# Altium PCB PCB.PcbDoc
Units mil, origin at the board's own origin, x right, y up, seen from the top; angles counter-clockwise.
Board outline 6000 x 4000 mil, 2 copper layers (Top Layer, Bottom Layer); 125 components, 112 nets, 372 pads, 0 vias.
Unrouted connection lines stored in the file: 244.
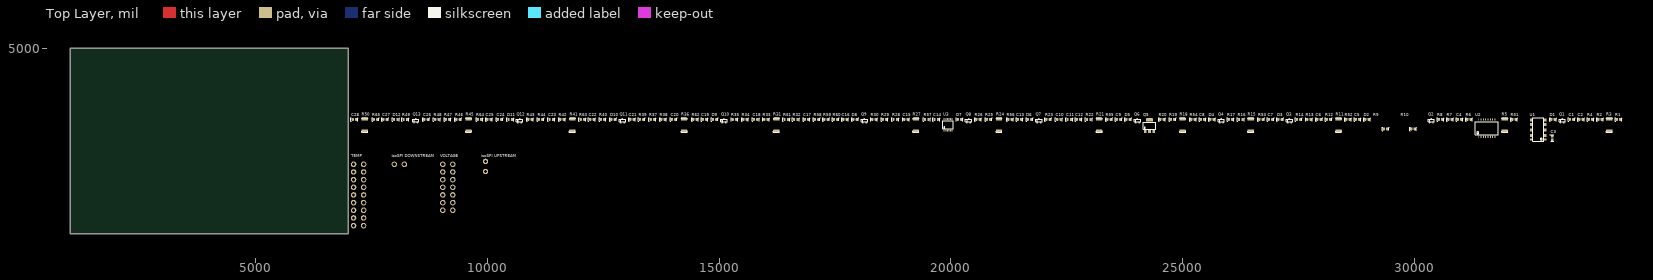
[diagram p0: Top Layer view]
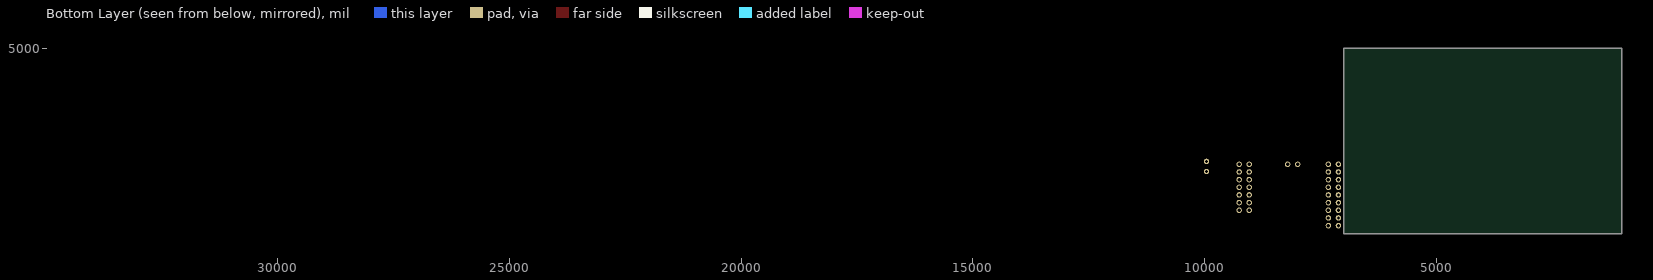
[diagram p1: Bottom Layer view, seen from below]

## Layer stack, top to bottom
Top Solder: solder mask 0.4, Solder Resist, Dk 3.5
Top Layer: signal copper 1.4
Dielectric 1: dielectric 12.6, FR-4, Dk 4.8
Bottom Layer: signal copper 1.4
Bottom Solder: solder mask 0.4, Solder Resist, Dk 3.5

## Board outline
1000,1000 7000,1000 7000,5000 1000,5000

## Design rules (kind name [scope] priority, off if disabled: settings)
Clearance [All] p1: gap=10 ignorepadtopadclearanceinfootprint=FALSE except(0: Arc-Hole Track-Hole SMDPad-Hole THPad-Hole Via-Hole Fill-Hole Poly-Hole Region-Hole Text-Hole; 3.94: THPad-THPad; 6: Arc-SMDPad Track-SMDPad SMDPad-SMDPad; 7.87: Arc-THPad Track-THPad SMDPad-THPad THPad-Via; 8: Arc-Arc Arc-Track Arc-Region Track-Track Track-Region SMDPad-Region THPad-Region Via-Region Fill-Region Poly-Region Region-Region; 23.62: Arc-Poly Track-Poly SMDPad-Poly THPad-Poly Via-Poly Fill-Poly Poly-Poly)
Height [All] p1: minheight=0 maxheight=1968.5 prefheight=500
HoleSize [All] p1: absolutevalues=TRUE maxlimit=393.7 minlimit=1 maxpercent=80.000 minpercent=20.000
PlaneClearance [All] p1: clearance=15.75
PlaneConnect [All] p1: pad.planeconnectstyle=Relief pad.reliefexpansion=20 pad.reliefentries=4 pad.reliefconductorwidth=31.5 pad.reliefairgap=10 via.planeconnectstyle=Direct via.reliefexpansion=20 via.reliefentries=4 via.reliefconductorwidth=31.5 via.reliefairgap=10
PolygonConnect [All] p1: thpad.connectstyle=Relief thpad.reliefconductorwidth=23.62 thpad.reliefentries=4 thpad.polygonreliefangle="90 Angle" thpad.airgapwidth=10 smdpad.connectstyle=Relief smdpad.reliefconductorwidth=23.62 smdpad.reliefentries=4 smdpad.polygonreliefangle="90 Angle" smdpad.airgapwidth=10 via.connectstyle=Direct via.reliefconductorwidth=23.62 via.reliefentries=4 via.polygonreliefangle="90 Angle" via.airgapwidth=10
RoutingVias [All] p1: holewidth=28 width=50 viastyle="Through Hole" minholewidth=8 minwidth=10 maxholewidth=28 maxwidth=50
SolderMaskExpansion [All] p1: expansion=2
Width [All] p1: maxlimit=118.11 minlimit=5 preferedwidth=19.68
26 further rules are at their usual default settings.

## Classes and differential pairs
component class "Top Level": "isoSPI DOWNSTREAM" "isoSPI UPSTREAM" TEMP VOLTAGE

## Components (designator, comment, footprint, x,y, rotation, side; value= is the part's Value field where it differs from the comment)
C1 "100nF" 0805 33395,3465 r0 top
C2 "100nF" 0805 33595,3465 r0 top
C3 "10nF" 0805 32975,3060 r270 top
C4 "10nF" 0805 30975,3465 r0 top
C5 "10nF" 0805 28775,3465 r0 top
C6 "10nF" 0805 27945,3465 r0 top
C7 "10nF" 0805 26900,3465 r0 top
C8 "10nF" 0805 25430,3465 r0 top
C9 "10nF" 0805 23620,3465 r0 top
C10 "1uF" 0805 22330,3465 r0 top
C11 "1uF" 0805 22555,3465 r0 top
C12 "1uF" 0805 22755,3465 r0 top
C13 "10nF" 0805 21480,3465 r0 top
C14 "10nF" 0805 19685,3465 r0 top
C15 "100nF" 0805 19030,3465 r0 top
C16 "1uF" 0805 17715,3465 r0 top
C17 "10nF" 0805 16885,3465 r0 top
C18 "1uF" 0805 15790,3465 r0 top
C19 "10nF" 0805 14685,3465 r0 top
C20 "1uF" 0805 14020,3465 r0 top
C21 "1uF" 0805 13120,3465 r0 top
C22 "10nF" 0805 12255,3465 r0 top
C23 "1uF" 0805 11380,3465 r0 top
C24 "10nF" 0805 10265,3465 r0 top
C25 "1uF" 0805 10035,3465 r0 top
C26 "1uF" 0805 8680,3465 r0 top
C27 "10nF" 0805 7795,3465 r0 top
C28 "1uF" 0805 7130,3465 r0 top
D1 "Red" "0805 LED" 32990,3465 r0 top
D2 "Red" "0805 LED" 28980,3465 r0 top
D3 "Red" "0805 LED" 27105,3465 r0 top
D4 "Red" "0805 LED" 25635,3465 r0 top
D5 "Red" "0805 LED" 23825,3465 r0 top
D6 "Red" "0805 LED" 21700,3465 r0 top
D7 "Red" "0805 LED" 20185,3465 r0 top
D8 "Red" "0805 LED" 17935,3465 r0 top
D9 "Red" "0805 LED" 14905,3465 r0 top
D10 "Red" "0805 LED" 12715,3465 r0 top
D11 "Red" "0805 LED" 10495,3465 r0 top
D12 "Red" "0805 LED" 8025,3465 r0 top
"isoSPI DOWNSTREAM" "39300020" 39300020 8210,2495 r90 top
"isoSPI UPSTREAM" "39300020" 39300020 9960,2340 r0 top
Q1 "BSS308PEH6327XTSA1" "IN SOT-23 MOSFET" 33190,3435 r0 top
Q2 "BSS308PEH6327XTSA1" "IN SOT-23 MOSFET" 30365,3435 r0 top
Q3 "BSS308PEH6327XTSA1" "IN SOT-23 MOSFET" 27305,3435 r0 top
Q4 "BSS308PEH6327XTSA1" "IN SOT-23 MOSFET" 25835,3435 r0 top
Q5 "NSV1C201MZ4T1G" "ON SOT-223 BJT" 24195,3205 r0 top
Q6 "BSS308PEH6327XTSA1" "IN SOT-23 MOSFET" 24025,3435 r0 top
Q7 "BSS308PEH6327XTSA1" "IN SOT-23 MOSFET" 21900,3435 r0 top
Q8 "BSS308PEH6327XTSA1" "IN SOT-23 MOSFET" 20385,3435 r0 top
Q9 "BSS308PEH6327XTSA1" "IN SOT-23 MOSFET" 18135,3435 r0 top
Q10 "BSS308PEH6327XTSA1" "IN SOT-23 MOSFET" 15105,3435 r0 top
Q11 "BSS308PEH6327XTSA1" "IN SOT-23 MOSFET" 12915,3435 r0 top
Q12 "BSS308PEH6327XTSA1" "IN SOT-23 MOSFET" 10695,3435 r0 top
Q13 "BSS308PEH6327XTSA1" "IN SOT-23 MOSFET" 8455,3435 r0 top
R1 "100R" 0805 34405,3465 r0 top
R2 "100R" 0805 34005,3465 r0 top
R3 "100R" 2512 34205,3215 r90 top
R4 "3.3k" 0805 33800,3465 r0 top
R5 "33R" 2512 31950,3215 r90 top
R6 "100R" 0805 31180,3465 r0 top
R7 "3.3k" 0805 30770,3465 r0 top
R8 "100R" 0805 30565,3465 r0 top
R9 "1k" 0805 29380,3260 r0 top
R10 "1k" 0805 29970,3260 r0 top
R11 "33R" 2512 28365,3215 r90 top
R12 "100R" 0805 28150,3465 r0 top
R13 "3.3k" 0805 27725,3465 r0 top
R14 "100R" 0805 27505,3465 r0 top
R15 "33R" 2512 26470,3215 r90 top
R16 "100R" 0805 26255,3465 r0 top
R17 "3.3k" 0805 26035,3465 r0 top
R18 "33R" 2512 25000,3215 r90 top
R19 "100R" 0805 24785,3465 r0 top
R20 "3.3k" 0805 24555,3465 r0 top
R21 "33R" 2512 23200,3215 r90 top
R22 "100R" 0805 22975,3465 r0 top
R23 "3.3k" 0805 22100,3465 r0 top
R24 "33R" 2512 21040,3215 r90 top
R25 "100R" 0805 20815,3465 r0 top
R26 "3.3k" 0805 20585,3465 r0 top
R27 "33R" 2512 19245,3215 r90 top
R28 "100R" 0805 18800,3465 r0 top
R29 "10k" 0805 18570,3465 r0 top
R30 "3.3k" 0805 18340,3465 r0 top
R31 "33R" 2512 16235,3215 r90 top
R32 "10k" 0805 16655,3465 r0 top
R33 "100R" 0805 16010,3465 r0 top
R34 "3.3k" 0805 15560,3465 r0 top
R35 "10k" 0805 15330,3465 r0 top
R36 "33R" 2512 14245,3215 r90 top
R37 "100R" 0805 13560,3465 r0 top
R38 "10k" 0805 13790,3465 r0 top
R39 "3.3k" 0805 13330,3465 r0 top
R40 "10k" 0805 12485,3465 r0 top
R41 "33R" 2512 11835,3215 r90 top
R42 "100R" 0805 11610,3465 r0 top
R43 "3.3k" 0805 10920,3465 r0 top
R44 "10k" 0805 11150,3465 r0 top
R45 "33R" 2512 9595,3215 r90 top
R46 "10k" 0805 9370,3465 r0 top
R47 "100R" 0805 9140,3465 r0 top
R48 "3.3k" 0805 8910,3465 r0 top
R49 "10k" 0805 8230,3465 r0 top
R50 "33R" 2512 7355,3215 r90 top
R51 "470R" 0805 32150,3465 r0 top
R52 "470R" 0805 28570,3465 r0 top
R53 "470R" 0805 26695,3465 r0 top
R54 "470R" 0805 25225,3465 r0 top
R55 "470R" 0805 23415,3465 r0 top
R56 "470R" 0805 21275,3465 r0 top
R57 "470R" 0805 19480,3465 r0 top
R58 "56k" 0805 17105,3465 r0 top
R59 "56k" 0805 17310,3465 r0 top
R60 "56k" 0805 17515,3465 r0 top
R61 "470R" 0805 16450,3465 r0 top
R62 "470R" 0805 14480,3465 r0 top
R63 "470R" 0805 12050,3465 r0 top
R64 "470R" 0805 9830,3465 r0 top
R65 "470R" 0805 7590,3465 r0 top
TEMP "39300180" 39300180 7330,2495 r90 top
U1 "LTC6811-1" "LT 48-SSOP" 32670,3245 r90 top
U2 "TG110-AE050N5LFTR" "HALO N5" 31565,3275 r0 top
U3 "ADG708" "AD 16-TSSOP" 19850,3220 r0 top
VOLTAGE "39300140" 39300140 9255,2495 r90 top

## Footprints (in the part's own frame and the unit in brackets; to place one, negate y for a bottom-side part, rotate by r counter-clockwise, add the part's x,y. Pads: shape width x height; smd on the part's side, far side on the other; paste and mask are expansions set on the pad)
0805 [mil]
  rrect50% 51.18x59.06 smd: 1(-37.87,-1.03) 2(36.93,-1.03)
  silkscreen extent -73,-37 71,37, body extent -39,-26 39,26, height 29
"0805 LED" [mil]
  rrect50% 51.18x59.06 smd: A(-37.87,-1.03) K(36.93,-1.03)
  silkscreen extent -73,-37 71,37, body extent -43,-25 35,25, height 39
2512 [mm]
  rrect50% 1.6x3.5 smd: 1(0,0) 2(6.5,0)
  silkscreen extent -0.85,-1.6 7.3,1.6, body extent 0.1,-1.6 6.4,1.6, height 0.7
39300020 [mm]
  round 3 hole 1.8: 1(0,0) 2(0,5.5)
  round 1.524 hole 3.05: ""(0,-7.3)
  body extent -2.7,-13.97 3.1,5.97, height 11.4
39300140 [mm]
  round 3 hole 1.85: 1(0,0) 2(0,5.5) 3(-4.2,0) 4(-4.2,5.5) 5(-8.4,0) 6(-8.4,5.5) 7(-12.6,0) 8(-12.6,5.5) 9(-16.8,0) 10(-16.8,5.5) 11(-21,0) 12(-21,5.5) 13(-25.2,0) 14(-25.2,5.5)
  round 1.524 hole 3.05: ""(-25.2,-7.3) ""(0,-7.3)
  body extent -27.9,-13.9 3.1,6.04, height 11.4
39300180 [mm]
  round 3 hole 1.85: 1(0,0) 2(0,5.5) 3(-4.2,0) 4(-4.2,5.5) 5(-8.4,0) 6(-8.4,5.5) 7(-12.6,0) 8(-12.6,5.5) 9(-16.8,0) 10(-16.8,5.5) 11(-21,0) 12(-21,5.5) 13(-25.2,0) 14(-25.2,5.5) 15(-29.4,0) 16(-29.4,5.5) 17(-33.6,0) 18(-33.6,5.5)
  round 1.524 hole 3.05: ""(-33.6,-7.3) ""(0,-7.3)
  body extent -36.3,-13.87 3.1,6.07, height 11.4
"AD 16-TSSOP" [mm]
  oval 0.3x1.05 smd: 1(0.05,0.1) 2(0.7,0.1) 3(1.35,0.1) 4(2,0.1) 5(2.65,0.1) 6(3.3,0.1) 7(3.95,0.1) 8(4.6,0.1) 9(4.6,6.4) 10(3.95,6.4) 11(3.3,6.4) 12(2.65,6.4) 13(2,6.4) 14(1.35,6.4) 15(0.7,6.4) 16(0.05,6.4)
  silkscreen extent -0.5,1 5.1,5.5, body extent -0.24,0.05 4.86,6.45, height 1.2
"HALO N5" [mil]
  rrect50% 20x50 smd: 1(-175,-187.5) 2(-125,-187.5) 3(-75,-187.5) 4(-25,-187.5) 5(25,-187.5) 6(75,-187.5) 7(125,-187.5) 8(175,-187.5) 9(175,187.5) 10(125,187.5) 11(75,187.5) 12(25,187.5) 13(-25,187.5) 14(-75,187.5) 15(-125,187.5) 16(-175,187.5)
  silkscreen extent -250,-140 250,140, body extent -250,-188 250,188, height 250
"IN SOT-23 MOSFET" [mm] "NUP2105L"
  rrect50% 0.8x0.9 smd: D(0,1) G(-0.95,-1) S(0.95,-1)
  silkscreen extent -1.75,-0.65 1.75,0.75, body extent -1.5,-1.27 1.5,1.28, height 1
"LT 48-SSOP" [mm]
  rrect50% 0.3x1.25 smd mask+0.051: 1(-5.75,-3.9) 2(-5.25,-3.9) 3(-4.75,-3.9) 4(-4.25,-3.9) 5(-3.75,-3.9) 6(-3.25,-3.9) 7(-2.75,-3.9) 8(-2.25,-3.9) 9(-1.75,-3.9) 10(-1.25,-3.9) 11(-0.75,-3.9) 12(-0.25,-3.9) 13(0.25,-3.9) 14(0.75,-3.9) 15(1.25,-3.9) 16(1.75,-3.9) 17(2.25,-3.9) 18(2.75,-3.9) 19(3.25,-3.9) 20(3.75,-3.9) 21(4.25,-3.9) 22(4.75,-3.9) 23(5.25,-3.9) 24(5.75,-3.9) 25(5.75,3.9) 26(5.25,3.9) 27(4.75,3.9) 28(4.25,3.9) 29(3.75,3.9) 30(3.25,3.9) 31(2.75,3.9) 32(2.25,3.9) 33(1.75,3.9) 34(1.25,3.9) 35(0.75,3.9) 36(0.25,3.9) 37(-0.25,3.9) 38(-0.75,3.9) 39(-1.25,3.9) 40(-1.75,3.9) 41(-2.25,3.9) 42(-2.75,3.9) 43(-3.25,3.9) 44(-3.75,3.9) 45(-4.25,3.9) 46(-4.75,3.9) 47(-5.25,3.9) 48(-5.75,3.9)
  silkscreen extent -6.5,-3 6.5,3, body extent -6.55,-4.1 6.55,4.1, height 2.01
"ON SOT-223 BJT" [mm]
  rrect50% 1.5x2 smd: B(0,0) C(2.3,0) E(4.6,0)
  rrect50% 3.8x2 smd: C(2.3,6.3)
  silkscreen extent -1.1,1.25 5.75,5, body extent -0.92,-0.44 5.58,6.64, height 1.6

## Part data
C1 C2 C15: library part GCM21BR71E104KA37L, Manufacturer=muRata, Rated Voltage=25V, Tolerance=10%, Material=X7R, Part Number=GCM21BR71E104KA37L
C3 C4 C5 C6 C7 C8 C9 C13 C14 C17 C19 C22 C24 C27: library part GCM21BR71H103KA37L, Manufacturer=muRata, Rated Voltage=50V, Tolerance=10%, Material=X7R, Part Number=GCM21BR71H103KA37L
C10 C11 C12 C16 C18 C20 C21 C23 C25 C26 C28: library part AC0805KKX7R8BB105, Manufacturer=YAGEO, Rated Voltage=25V, Tolerance=10%, Material=X7R, Part Number=AC0805KKX7R8BB105
D1 D2 D3 D4 D5 D6 D7 D8 D9 D10 D11 D12: library part SML-210LTT86, "Red LED Indication - Discrete 1.75V 0805 (2012 Metric)", Digikey Part Number=511-1286-1-ND, Manufacturer="ROHM Semiconductor", Colour=Red, Digikey Link=https://www.digikey.com/product-detail/en/rohm-semiconductor/SML-210LTT86/511-1286-1-ND/637099, Part Number=SML-210LTT86
"isoSPI DOWNSTREAM" "isoSPI UPSTREAM": Digikey Part Number=WM21351-ND, Angle=90, Contact=Tin, Flange=No, Part Number=39300020, Pitch=4.2mm, Positions=2, Row Spacing=5.5mm
Q1 Q2 Q3 Q4 Q6 Q7 Q8 Q9 Q10 Q11 Q12 Q13: "P-Channel 30V 2A (Ta) 500mW (Ta) Surface Mount SOT-23-3", Digikey Part Number=BSS308PEH6327XTSA1CT-ND, Manufacturer="Infineon Technologies", Digikey Link=https://www.digikey.com/product-detail/en/infineon-technologies/BSS308PEH6327XTSA1/BSS308PEH6327XTSA1CT-ND/3196649, LatestRevisionDate=29-May-2009, LatestRevisionNote="IPC-7351 Footprint Added.", PackageDescription="4-Pin SOT-343 Package 1.3 mm Pitch, 2.1 mm Lead Span", PackageReference=SOT-343, PackageVersion=Sep-2000, Part Number=BSS308PEH6327XTSA1, Published=24-Mar-1999, Publisher="Altium Limited"
Q5: "Bipolar (BJT) Transistor NPN 100V 2A 100MHz 800mW Surface Mount SOT-223 (TO-261)", Digikey Part Number=NSV1C201MZ4T1GOSCT-ND, Manufacturer="ON Semiconductor", Digikey Link=https://www.digikey.com/product-detail/en/on-semiconductor/NSV1C201MZ4T1G/NSV1C201MZ4T1GOSCT-ND/5969293, Part Number=NSV1C201MZ4T1G
R1 R2 R6 R8 R12 R14 R16 R19 R22 R25 R28 R33 R37 R42 R47: library part RC0805FR07100RL, Manufacturer=YAGEO, Rated Voltage=0.125W, Tolerance=0.01, Material=FR-07, Part Number=RC0805FR07100RL
R3: library part 3521100RFT, Digikey Part Number=A116008CT-ND, Manufacturer="TE Connectivity", Rated Voltage=2W, Tolerance=0.01, Part Number=3521100RFT
R4 R7 R13 R17 R20 R23 R26 R30 R34 R39 R43 R48: library part RC0805FR073K3L, Manufacturer=YAGEO, Rated Voltage=0.125W, Tolerance=0.01, Material=FR-07, Part Number=RC0805FR073K3L
R5 R11 R15 R18 R21 R24 R27 R31 R36 R41 R45 R50: library part 352133RFT, Digikey Part Number=A115996CT-ND, Manufacturer="TE Connectivity", Rated Voltage=2W, Tolerance=0.01, Part Number=352133RFT
R9 R10: library part RC0805FR071KL, Digikey Part Number=311-1.00KCRCT-ND, Manufacturer=YAGEO, Rated Voltage=0.125W, Tolerance=0.01, Material=FR-07, Part Number=RC0805FR071KL
R29 R32 R35 R38 R40 R44 R46 R49: library part RC0805FR0710KL, Manufacturer=YAGEO, Rated Voltage=0.125W, Tolerance=0.01, Material=FR-07, Part Number=RC0805FR0710KL
R51 R52 R53 R54 R55 R56 R57 R61 R62 R63 R64 R65: library part RC0805FR07470RL, Manufacturer=YAGEO, Rated Voltage=0.125W, Tolerance=0.01, Material=FR-07, Part Number=RC0805FR07470RL
R58 R59 R60: library part RC0805FR0756KL, Manufacturer=YAGEO, Rated Voltage=0.125W, Tolerance=0.01, Material=FR-07, Part Number=RC0805FR0756KL
TEMP: Digikey Part Number=WM21359-ND, Angle=90, Contact=Tin, Flange=No, Part Number=39300180, Pitch=4.2mm, Positions=18, Row Spacing=5.5mm
U1: "Battery Battery Monitor IC Multi-Chemistry 48-SSOP", Digikey Part Number=LTC6811HG-1#PBF-ND, Manufacturer="Analog Devices", Digikey Link=https://www.digikey.com/product-detail/en/linear-technology-analog-devices/LTC6811HG-1-PBF/LTC6811HG-1-PBF-ND/6235369, Part Number=LTC6811-1
U2: "Audio Transformers / Signal Transformers 10/100BASE-TX SMD AEC-Q200 16P 1-Port", Manufacturer=HALO, Supplier Part Number=493-TG110AE050N5LFTR, Link=https://au.mouser.com/ProductDetail/HALO-Electronics/TG110-AE050N5LFTR?qs=sGAEpiMZZMv0IfuNuy2LUfZdSvNuW2VyV%2FR9bgCA%2FOQ%3D, Part Number=TG110-AE050N5LFTR
U3: "1 Circuit IC Switch 8:1 4.5Ohm 16-TSSOP", Digikey Part Number=ADG708BRUZ-ND, Manufacturer="Analog Devices", Digikey Link=https://www.digikey.com/product-detail/en/analog-devices-inc/ADG708BRUZ/ADG708BRUZ-ND/820104, Part Number=ADG708
VOLTAGE: Digikey Part Number=WM21357-ND, Angle=90, Contact=Tin, Flange=No, Part Number=39300140, Pitch=4.2mm, Positions=14, Row Spacing=5.5mm

## Nets (pads, with @x,y where several pads share a name; then routed paths per layer and width w, separated by ;. In a path a pad name is that pad's centre, name@x,y a point inside that pad or via, vN(x,y) a via of type N, cw(c..) or ccw(c..) an arc to the next point about the centre after c; other vN are vias at no path point)
A0: R60.2 U1.27 U3.1
A1: R59.2 U1.28 U3.16
A2: R58.2 U1.29 U3.15
C1: C24.1 C27.2 R47.2 U1.24
C2: C22.1 C24.2 R42.2 U1.22
C3: C19.1 C22.2 R37.2 U1.20
C4: C17.1 C19.2 R33.2 U1.18
C5: C14.1 C17.2 R28.2 U1.16
C6: C13.1 C14.2 R25.2 U1.14
C7: C9.1 C13.2 R22.2 U1.12
C8: C8.1 C9.2 R19.2 U1.10
C9: C7.1 C8.2 R16.2 U1.8
C10: C5.1 C7.2 R12.2 U1.6
C11: C3.1 C5.2 R6.2 U1.4
C12: C3.2 R2.2 U1.2
Data: U1.33 U3.8
IMA: R14.1 U1.41 U2.8
IPA: R14.2 U1.42 U2.6
IPB: R8.2 U1.48 U2.1
IPM: R8.1 U1.47 U2.3
"isoSPI IMA": "isoSPI DOWNSTREAM.2" U2.9
"isoSPI IMB": "isoSPI UPSTREAM.2" U2.14
"isoSPI IPA": "isoSPI DOWNSTREAM.1" U2.11
"isoSPI IPB": "isoSPI UPSTREAM.1" U2.16
NetC2_2: C2.2 R1.2
NetC4_2: C4.2 U2.2
NetC6_2: C6.2 U2.7
NetC10_2: C10.2 U1.34
NetC11_2: C11.2 U1.35
NetD1_A: D1.A R51.2
NetD2_A: D2.A R52.2
NetD3_A: D3.A R53.2
NetD4_A: D4.A R54.2
NetD5_A: D5.A R55.2
NetD6_A: D6.A R56.2
NetD7_A: D7.A R57.2
NetD8_A: D8.A R61.2
NetD9_A: D9.A R62.2
NetD10_A: D10.A R63.2
NetD11_A: D11.A R64.2
NetD12_A: D12.A R65.2
NetQ1_D: Q1.D R5.2 R51.1
NetQ1_G: Q1.G R4.1
NetQ2_D: Q2.D R11.2 R52.1
NetQ2_G: Q2.G R7.1
NetQ3_D: Q3.D R15.2 R53.1
NetQ3_G: Q3.G R13.1
NetQ4_D: Q4.D R18.2 R54.1
NetQ4_G: Q4.G R17.1
NetQ5_B: Q5.B U1.38
NetQ6_D: Q6.D R21.2 R55.1
NetQ6_G: Q6.G R20.1
NetQ7_D: Q7.D R24.2 R56.1
NetQ7_G: Q7.G R23.1
NetQ8_D: Q8.D R27.2 R57.1
NetQ8_G: Q8.G R26.1
NetQ9_D: Q9.D R31.2 R61.1
NetQ9_G: Q9.G R30.1
NetQ10_D: Q10.D R36.2 R62.1
NetQ10_G: Q10.G R34.1
NetQ11_D: Q11.D R41.2 R63.1
NetQ11_G: Q11.G R39.1
NetQ12_D: Q12.D R45.2 R64.1
NetQ12_G: Q12.G R43.1
NetQ13_D: Q13.D R50.2 R65.1
NetQ13_G: Q13.G R48.1
NetR9_1: R9.1 U1.45
NetR9_2: R9.2 R10.1 U1.46
S1: R48.2 U1.25
S2: R43.2 U1.23
S3: R39.2 U1.21
S4: R34.2 U1.19
S5: R30.2 U1.17
S6: R26.2 U1.15
S7: R23.2 U1.13
S8: R20.2 U1.11
S9: R17.2 U1.9
S10: R13.2 U1.7
S11: R7.2 U1.5
S12: R4.2 U1.3
"TAP 0": C1.1 C2.1 C4.1 C6.1 C10.1 C11.1 C12.1 C15.1 C16.1 C18.1 C20.1 C21.1 C23.1 C25.1 C26.1 C27.1 C28.1 D12.K R10.2 R50.1 R58.1 R59.1 R60.1 TEMP.2 TEMP.4 TEMP.6 TEMP.8 TEMP.10 TEMP.12 TEMP.14 TEMP.16 TEMP.18 U1.26 U1.30 U1.31 U3.3 U3.14 VOLTAGE.2
"TAP 1": D11.K Q13.S R45.1 R47.1 VOLTAGE.1
"TAP 2": D10.K Q12.S R41.1 R42.1 VOLTAGE.4
"TAP 3": D9.K Q11.S R36.1 R37.1 VOLTAGE.3
"TAP 4": D8.K Q10.S R31.1 R33.1 VOLTAGE.6
"TAP 5": D7.K Q9.S R27.1 R28.1 VOLTAGE.5
"TAP 6": D6.K Q8.S R24.1 R25.1 VOLTAGE.8
"TAP 7": D5.K Q7.S R21.1 R22.1 VOLTAGE.7
"TAP 8": D4.K Q6.S R18.1 R19.1 VOLTAGE.10
"TAP 9": D3.K Q4.S R15.1 R16.1 VOLTAGE.9
"TAP 10": D2.K Q3.S R11.1 R12.1 VOLTAGE.12
"TAP 11": D1.K Q2.S R5.1 R6.1 VOLTAGE.11
"TAP 12": Q1.S R1.1 R2.1 R3.1 VOLTAGE.13 VOLTAGE.14
TEMP1: TEMP.1
TEMP2: TEMP.3
TEMP3: TEMP.5
TEMP4: TEMP.7
TEMP5: TEMP.9
TEMP6: TEMP.11
TEMP7: TEMP.13
TEMP8: TEMP.15
TEMP9: TEMP.17
"TEMP 1": C16.2 R29.2 U3.4
"TEMP 2": C18.2 C20.2 R32.2 R35.2 U3.5
"TEMP 3": U3.6
"TEMP 4": C21.2 R38.2 U3.7
"TEMP 5": C23.2 R40.2 U3.12
"TEMP 6": C25.2 R44.2 U3.11
"TEMP 7": C26.2 R46.2 U3.10
"TEMP 8": C28.2 R49.2 U3.9
"V+ REF": C1.2 Q5.C R3.2 U1.1
"V+ REG": C12.2 C15.2 Q5.E R29.1 R32.1 R35.1 R38.1 R40.1 R44.1 R46.1 R49.1 U1.36 U1.37 U1.40 U3.2 U3.13
pads on no net: "isoSPI DOWNSTREAM." "isoSPI UPSTREAM." TEMP. U1.32 U1.39 U1.43 U1.44 U2.4 U2.5 U2.10 U2.12 U2.13 U2.15 VOLTAGE.